# EAGLE board GuitarPCB (EAGLE 8.5.0)
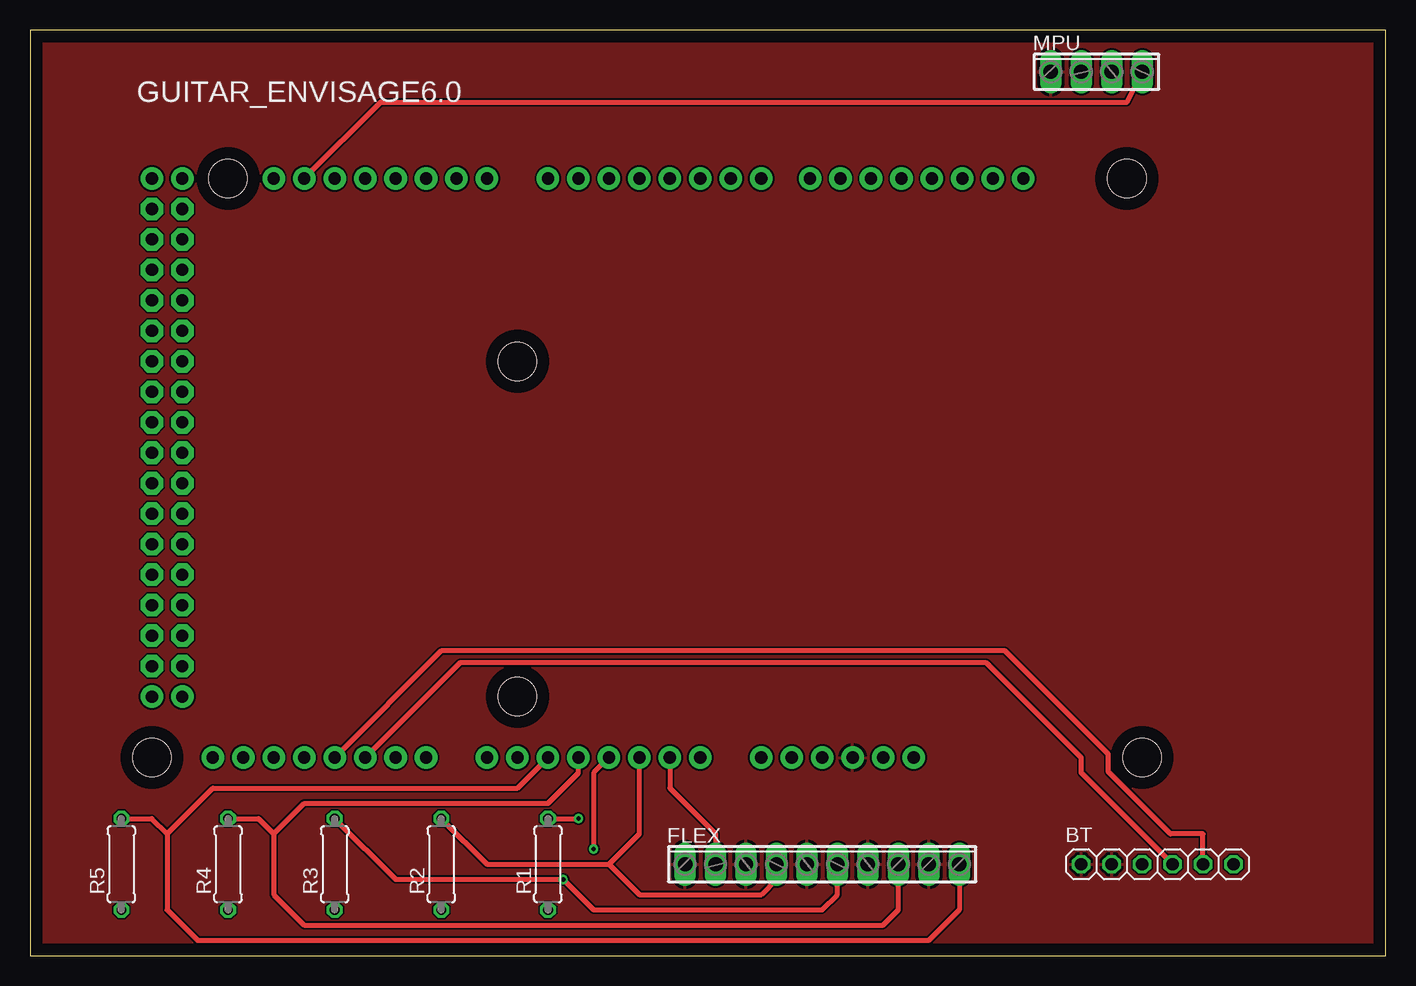
[diagram p0: board, top side]
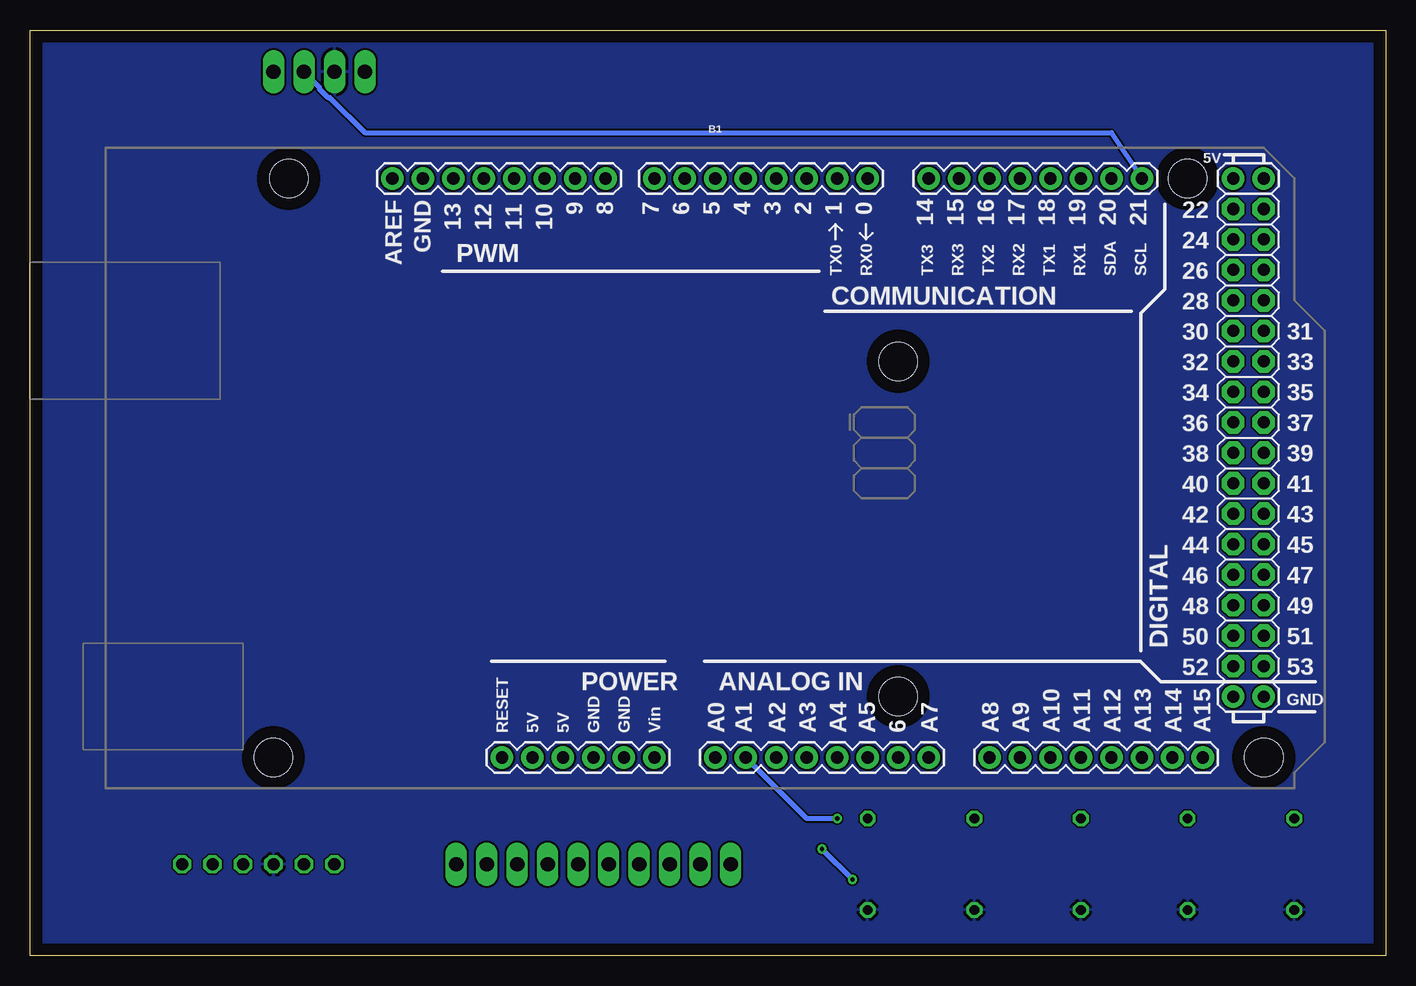
[diagram p1: board, bottom side, seen from below]

Size 113.01 x 77.14 mm. Coordinates in mm from the lower left corner, seen from the top.
Outline: 0,0 113.01,0 113.01,77.14 0,77.14 0,0
Copper layers (1*16): Top 0.035mm / dielectric 1.5mm / Bottom 0.035mm
Design rules "default": minimum track width 6mil, minimum drill 0.35mm, track to track 6mil, track to pad 6mil, pad to pad 6mil, via to via 6mil, smd to smd 6mil, copper to edge 40mil, drill to drill 6mil, minimum pad ring 10mil, minimum via ring 8mil, stop-mask expansion 4mil, vias tented up to drill 0mil, thermal gap 10mil

## Footprints (pad centres in the part's own frame; a part is rotated, then mirrored left to right if it is on the bottom)
ARDUINO_MEGA = drill 1.016 pad 1.88: 0 13.97,24.13; 1 11.43,24.13; 2 8.89,24.13; 3 6.35,24.13; 3.3V -13.97,-24.13; 4 3.81,24.13; 5 1.27,24.13; 5V@0 -11.43,-24.13; 5V@1 44.45,24.13; 5V@2 46.99,24.13; 6 -1.27,24.13; 7 -3.81,24.13; 8 -7.874,24.13; 9 -10.414,24.13; 10 -12.954,24.13; 11 -15.494,24.13; 12 -18.034,24.13; 13 -20.574,24.13; 14 19.05,24.13; 15 21.59,24.13; 16 24.13,24.13; 17 26.67,24.13; 18 29.21,24.13; 19 31.75,24.13; 20 34.29,24.13; 21 36.83,24.13; A0 1.27,-24.13; A1 3.81,-24.13; A2 6.35,-24.13; A3 8.89,-24.13; A4 11.43,-24.13; A5 13.97,-24.13; A6 16.51,-24.13; A7 19.05,-24.13; A8 24.13,-24.13; A9 26.67,-24.13; A10 29.21,-24.13; A11 31.75,-24.13; A12 34.29,-24.13; A13 36.83,-24.13; A14 39.37,-24.13; A15 41.91,-24.13; AREF -25.654,24.13; GND@0 -8.89,-24.13; GND@1 -6.35,-24.13; GND@2 44.45,-19.05; GND@3 46.99,-19.05; GND@4 -23.114,24.13; RESET -16.51,-24.13; VIN -3.81,-24.13 | drill 1.016 pad 1.88 octagon: 22 44.45,21.59; 23 46.99,21.59; 24 44.45,19.05; 25 46.99,19.05; 26 44.45,16.51; 27 46.99,16.51; 28 44.45,13.97; 29 46.99,13.97; 30 44.45,11.43; 31 46.99,11.43; 32 44.45,8.89; 33 46.99,8.89; 34 44.45,6.35; 35 46.99,6.35; 36 44.45,3.81; 37 46.99,3.81; 38 44.45,1.27; 39 46.99,1.27; 40 44.45,-1.27; 41 46.99,-1.27; 42 44.45,-3.81; 43 46.99,-3.81; 44 44.45,-6.35; 45 46.99,-6.35; 46 44.45,-8.89; 47 46.99,-8.89; 48 44.45,-11.43; 49 46.99,-11.43; 50 44.45,-13.97; 51 46.99,-13.97; 52 44.45,-16.51; 53 46.99,-16.51 | hole 3.2: -34.29,24.13; -35.56,-24.13; 16.51,8.89; 16.51,-19.05; 40.64,24.13; 46.99,-24.13
1X06 = drill 1.016 octagon: 1 -6.35,0; 2 -3.81,0; 3 -1.27,0; 4 1.27,0; 5 3.81,0; 6 6.35,0
10POL254 = drill 1.2 long: 1 -11.43,0; 2 -8.89,0; 3 -6.35,0; 4 -3.81,0; 5 -1.27,0; 6 1.27,0; 7 3.81,0; 8 6.35,0; 9 8.89,0; 10 11.43,0
4POL254 = drill 1.2 long: 1 -3.81,0; 2 -1.27,0; 3 1.27,0; 4 3.81,0
0207/7 = drill 0.813 octagon: 1 -3.81,0; 2 3.81,0

## Placement (x,y rotation side)
B1  ARDUINO_MEGA_R3FULL  [ARDUINO_MEGA]  57.15,40.64 0 bottom
BT  [1X06]  93.98,7.62 0 top
FLEX  [10POL254]  66.04,7.62 0 top
MPU  [4POL254]  88.9,73.66 0 top
R1  [0207/7]  43.18,7.62 90 top
R2  [0207/7]  34.29,7.62 90 top
R3  [0207/7]  25.4,7.62 90 top
R4  [0207/7]  16.51,7.62 90 top
R5  [0207/7]  7.62,7.62 90 top

## Library data of the parts
B1 = SparkfunBoards
BT R1-R5 = adafruit
FLEX MPU = con-phoenix-254; OC_FARNELL: unknown; OC_NEWARK: unknown

## Nets
5V: B1.5V@0 BT.1 BT.2 FLEX.1 FLEX.3 FLEX.5 FLEX.7 FLEX.9 MPU.1
GND: BT.3 MPU.2 R1.1 R2.1 R3.1 R4.1 R5.1
N$1: B1.A1 FLEX.2 R1.2
N$2: B1.A2 FLEX.4 R2.2
N$3: B1.A10 BT.4
N$4: B1.A3 FLEX.6 R3.2
N$5: B1.A4 FLEX.8 R4.2
N$6: B1.A5 FLEX.10 R5.2
N$7: B1.A11 BT.5
N$8: B1.21 MPU.3
N$9: B1.20 MPU.4

## Tracks (layer width: path | path; a pad name or v marks a point on that pad's centre or on a via)
5V
  pour Top: -2.54,80.01 115.57,80.01 115.57,-8.89 -2.54,-8.89
GND
  pour Bottom: -5.08,82.55 119.38,82.55 119.38,-10.16 -5.08,-10.16
N$1  (via drill 0.35)
  Top 0.406: B1.A1 53.34,13.97 57.15,10.16 FLEX.2 | R1.2 v45.72,11.43
  Bottom 0.406: v45.72,11.43 48.26,11.43 B1.A1
N$2
  Top 0.406: R2.2 38.1,7.62 48.26,7.62 | 48.26,7.62 50.8,5.08 60.96,5.08 62.23,6.35 FLEX.4 | 48.26,7.62 50.8,10.16 B1.A2
N$3
  Top 0.406: BT.4 87.63,15.24 87.63,16.51 79.73,24.41 35.84,24.41 B1.A10
N$4  (via drill 0.35)
  Top 0.406: R3.2 30.48,6.35 v44.45,6.35 46.99,3.81 66.04,3.81 67.31,5.08 FLEX.6 | B1.A3 46.99,15.24 v46.99,8.89
  Bottom 0.406: v46.99,8.89 v44.45,6.35
N$5
  Top 0.406: R4.2 19.05,11.43 20.32,10.16 | 20.32,10.16 20.32,5.08 22.86,2.54 71.12,2.54 72.39,3.81 FLEX.8 | 20.32,10.16 22.86,12.7 43.18,12.7 45.72,15.24 B1.A4
N$6
  Top 0.406: R5.2 10.16,11.43 11.43,10.16 | 11.43,10.16 11.43,3.81 13.97,1.27 74.93,1.27 77.47,3.81 FLEX.10 | 11.43,10.16 15.24,13.97 40.64,13.97 B1.A5
N$7
  Top 0.406: BT.5 97.79,10.16 95.07,10.16 89.89,15.34 89.89,16.79 81.28,25.4 34.29,25.4 B1.A11
N$8
  Bottom 0.406: MPU.3 88.89,72.38 88.89,72.24 88.15,71.5 88.01,71.5 85.09,68.58 22.86,68.58 B1.21
N$9
  Top 0.406: B1.20 29.21,71.12 91.44,71.12 MPU.4

## Text on the board
tNames: GUITAR_ENVISAGE6.0